# EAGLE board raspi (EAGLE 9.2.2)

Size 160 x 100 mm. Coordinates in mm from the lower left corner, seen from the top.
Outline: 0,0 160,0 160,100 0,100 0,0
Copper layers (1*16): Top 0.035mm / dielectric 1.5mm / Bottom 0.035mm
Design rules "default": minimum track width 6mil, minimum drill 0.35mm, track to track 6mil, track to pad 6mil, pad to pad 6mil, via to via 6mil, smd to smd 6mil, copper to edge 40mil, drill to drill 6mil, minimum pad ring 10mil, minimum via ring 8mil, stop-mask expansion 4mil, vias tented up to drill 0mil, thermal gap 10mil
Net classes: 1 5A: width 2.8 mm, drill 0.5 mm; 2 2A: width 0.8 mm, drill 0.4 mm; 3 1A: width 0.3 mm, drill 0.35 mm

## Footprints (pad centres in the part's own frame; a part is rotated, then mirrored left to right if it is on the bottom)
C1210 = smd 1.6 x 2.7: 1 -1.4,0; 2 1.4,0
E3,5-8 = drill 0.813 pad 1.6: + -1.778,0 | drill 0.813 pad 1.6 octagon: - 1.778,0
TO-277A = smd 1.4 x 1.27: +1 -1.04,-1; +2 1.04,-1 | smd 4.8 x 4.72: - 0,2.81
SIP3 = drill 1 pad 1.676: 1 -2.54,0; 2 0,0; 3 2.54,0
MF-LSMF300 = smd 2 x 5.3: 1 -3.3,0; 2 3.3,0
1X02 = drill 1.016 long: 1 -1.27,0; 2 1.27,0
1206 = smd 1.6 x 1.803: A -1.422,0; C 1.422,0
R0805 = smd 1.3 x 1.5: 1 -0.95,0; 2 0.95,0
2X20/90 = drill 1.016 octagon: 1 -24.13,-6.35; 2 -24.13,-3.81; 3 -21.59,-6.35; 4 -21.59,-3.81; 5 -19.05,-6.35; 6 -19.05,-3.81; 7 -16.51,-6.35; 8 -16.51,-3.81; 9 -13.97,-6.35; 10 -13.97,-3.81; 11 -11.43,-6.35; 12 -11.43,-3.81; 13 -8.89,-6.35; 14 -8.89,-3.81; 15 -6.35,-6.35; 16 -6.35,-3.81; 17 -3.81,-6.35; 18 -3.81,-3.81; 19 -1.27,-6.35; 20 -1.27,-3.81; 21 1.27,-6.35; 22 1.27,-3.81; 23 3.81,-6.35; 24 3.81,-3.81; 25 6.35,-6.35; 26 6.35,-3.81; 27 8.89,-6.35; 28 8.89,-3.81; 29 11.43,-6.35; 30 11.43,-3.81; 31 13.97,-6.35; 32 13.97,-3.81; 33 16.51,-6.35; 34 16.51,-3.81; 35 19.05,-6.35; 36 19.05,-3.81; 37 21.59,-6.35; 38 21.59,-3.81; 39 24.13,-6.35; 40 24.13,-3.81
SWITCH_LPV-1 = drill 1.85: 1 0,10.16; 2 0,13.97; 3 0,17.78; B -2.225,0; B1 2.225,0
PUSH-BUTTON = smd 1.4 x 2.1: 1 2.25,4.55; 2 2.25,-4.55; 3 -2.25,4.55; 4 -2.25,-4.55

## Placement (x,y rotation side)
C4  10µF/50V  [C1210]  2.54,-86.36 0 top  (outside the outline)
C9  220µF/25V  [E3,5-8]  5.08,-77.47 0 top  (outside the outline)
C11  10µF/50V  [C1210]  12.7,-86.36 0 top  (outside the outline)
D1  DIODE_S15P45  [TO-277A]  12.7,-38.1 0 top  (outside the outline)
DC3  TSR 2-2450  [SIP3]  6.35,-67.31 0 top  (outside the outline)
F1  MF-LSMF300  [MF-LSMF300]  6.35,-133.35 0 top  (outside the outline)
JP1  [1X02]  3.81,-58.42 0 top  (outside the outline)
LED1  blue  [1206]  2.54,-118.11 0 top  (outside the outline)
LED4  red  [1206]  10.16,-24.13 0 top  (outside the outline)
R1  470  [R0805]  2.54,-124.46 0 top  (outside the outline)
R9  10k  [R0805]  22.86,-24.13 0 top  (outside the outline)
R10  330  [R0805]  16.51,-24.13 0 top  (outside the outline)
RASPPBERRY_PI  [2X20/90]  27.94,-12.7 0 top  (outside the outline)
S1  [SWITCH_LPV-1]  5.08,-110.49 0 top  (outside the outline)
U$2  PUSH-BUTTON  [PUSH-BUTTON]  3.81,-26.67 0 top  (outside the outline)

## Library data of the parts
C4 C9 C11 R1 R9 R10 = resistor
D1 = diode_schottky; RS: 917-9118
DC3 = dc-dc-converter; RS: 906-8487
F1 = polyswitch; RS: 817-1652
JP1 RASPPBERRY_PI = pinhead
LED1 LED4 = led
S1 = switch; RS: 734-7306
U$2 = push-button; RS: 479-1491

## Nets
+3V3: R9.1
+5V [2A]: C9.+ DC3.3 R1.2
+5V_RPI: RASPPBERRY_PI.2 RASPPBERRY_PI.4
+24V [1A]: D1.- S1.2
GND: C4.2 C9.- C11.2 DC3.2 JP1.2 LED1.C LED4.C RASPPBERRY_PI.6 RASPPBERRY_PI.9 RASPPBERRY_PI.14 RASPPBERRY_PI.20 RASPPBERRY_PI.25 RASPPBERRY_PI.30 RASPPBERRY_PI.34 RASPPBERRY_PI.39 S1.B S1.B1 U$2.1 U$2.2
N$1 [1A]: C4.1 C11.1 DC3.1 S1.1
N$2: R9.2 RASPPBERRY_PI.29 U$2.3 U$2.4
N$3: LED1.A R1.1
N$4: D1.+1 D1.+2 F1.1
N$5: R10.1 RASPPBERRY_PI.31
N$11: LED4.A R10.2
V_LIPO [5A]: F1.2 JP1.1

## Tracks (layer width: path | path; a pad name or v marks a point on that pad's centre or on a via)
+5V  (2 unrouted)
+5V_RPI  (1 unrouted)
+24V  (1 unrouted)
GND  (18 unrouted)
N$1  (3 unrouted)
N$2  (3 unrouted)
N$3  (1 unrouted)
N$4  (2 unrouted)
N$5  (1 unrouted)
N$11  (1 unrouted)
V_LIPO  (1 unrouted)